# EAGLE board BQ25504 (EAGLE 9.6.1)
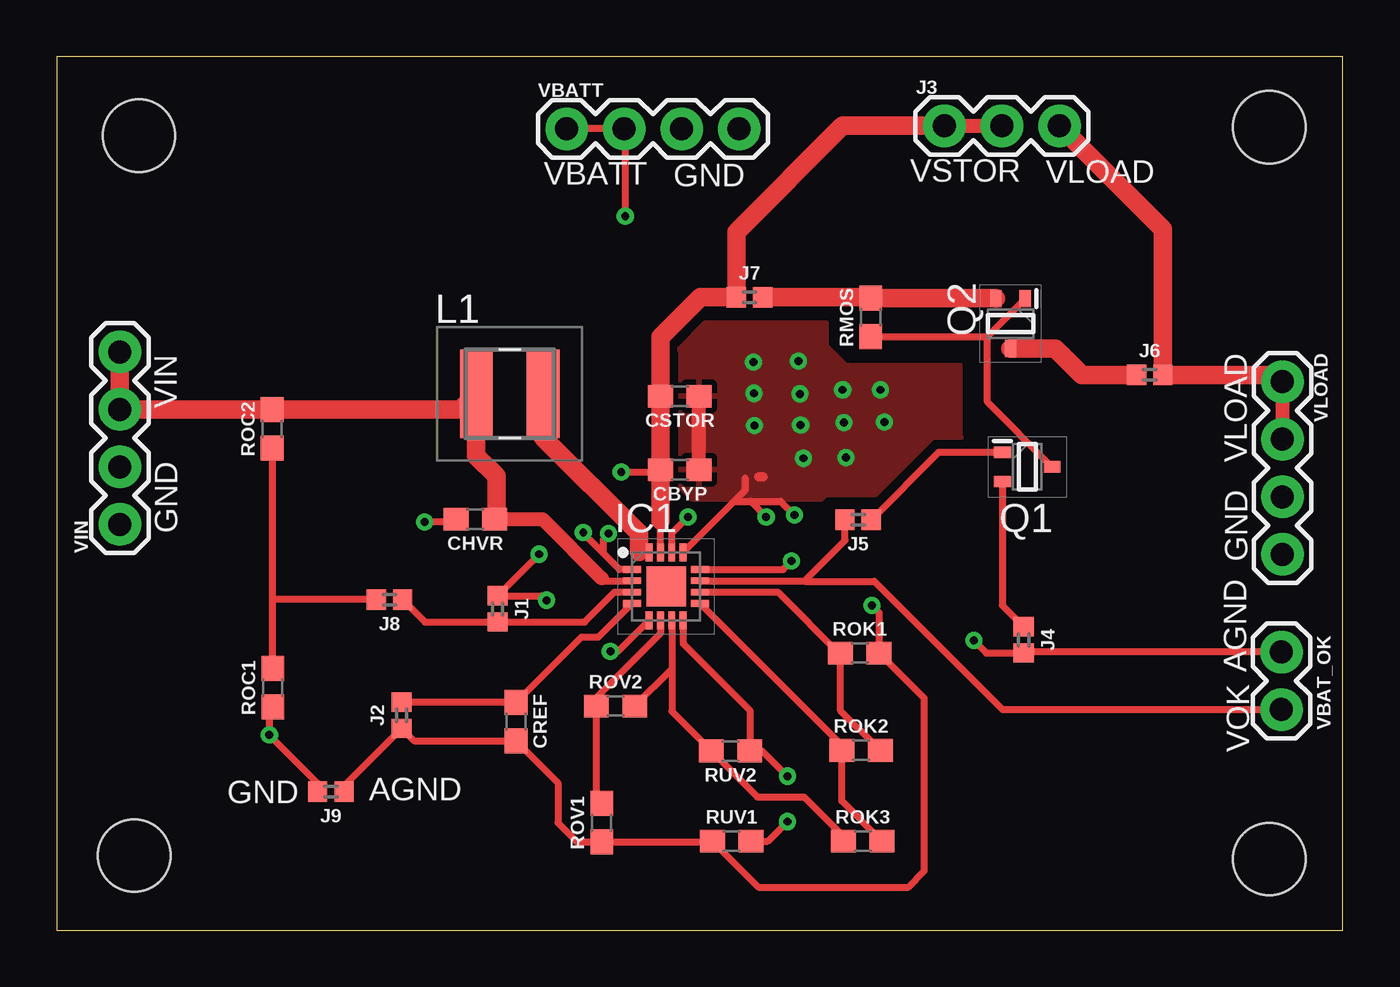
[diagram p0: board, top side]
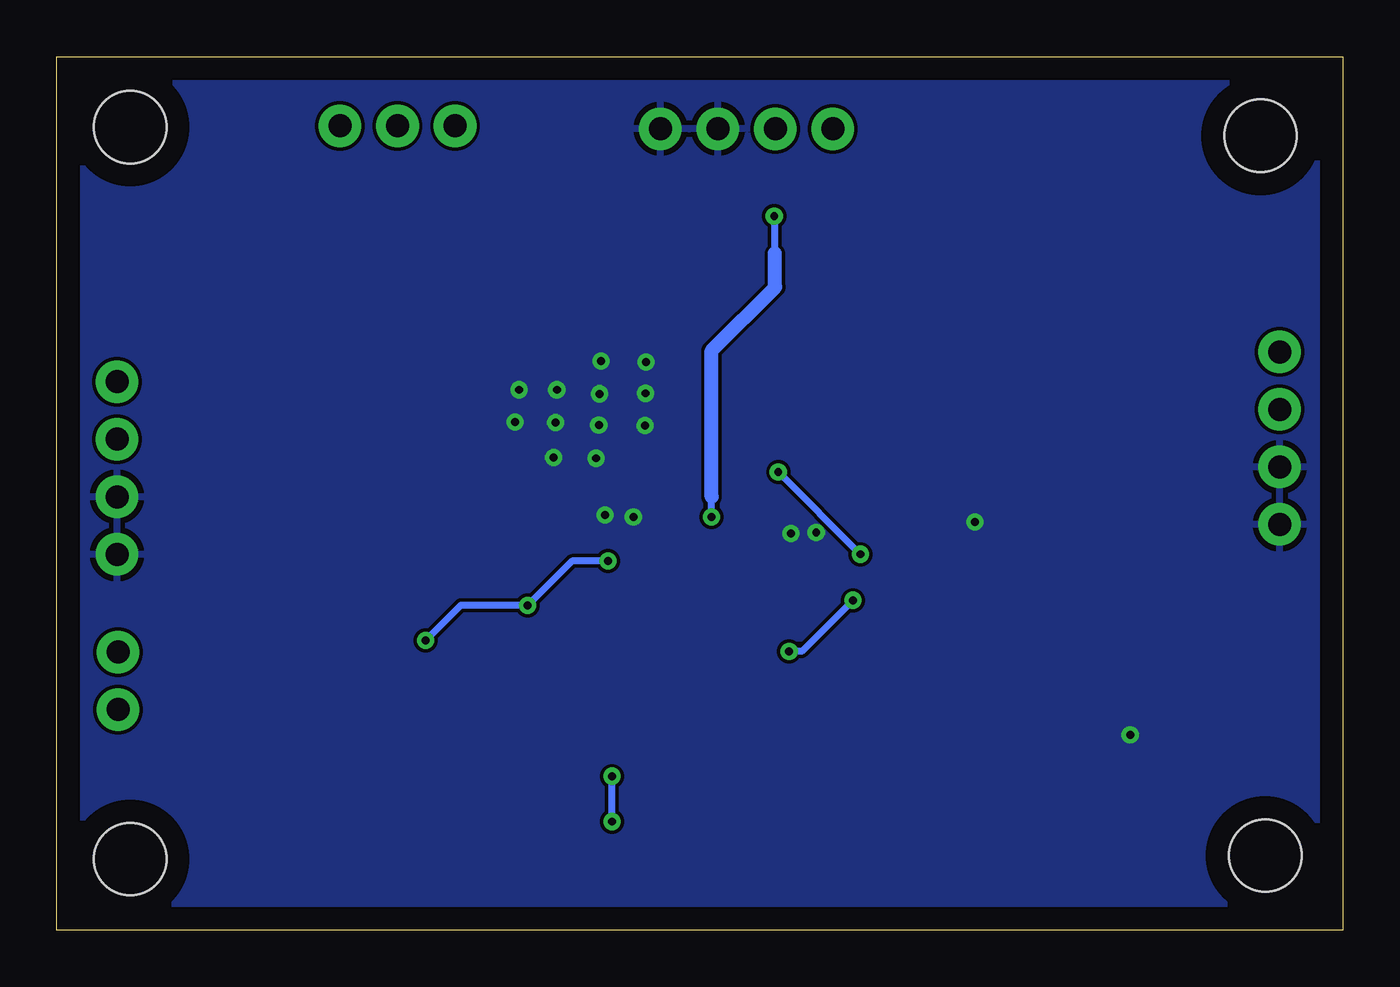
[diagram p1: board, bottom side, seen from below]

Size 56.82 x 38.6 mm. Coordinates in mm from the lower left corner, seen from the top.
Outline: 0,0 56.82,0 56.82,38.6 0,38.6 0,0
Copper layers (1*16): Top 0.035mm / dielectric 1.5mm / Bottom 0.035mm
Design rules "default": minimum track width 6mil, minimum drill 0.35mm, track to track 6mil, track to pad 6mil, pad to pad 6mil, via to via 6mil, smd to smd 6mil, copper to edge 40mil, drill to drill 6mil, minimum pad ring 10mil, minimum via ring 8mil, stop-mask expansion 4mil, vias tented up to drill 0mil, thermal gap 10mil
Holes 3.2 mm at 3.63,35.1 3.43,3.3 53.57,3.15 53.57,35.48

## Footprints (pad centres in the part's own frame; a part is rotated, then mirrored left to right if it is on the bottom)
0603 = smd 1.1 x 1: 1 -0.85,0; 2 0.85,0
QFN50P300X300X100-17N = smd 0.8 x 0.3: 1 -1.5,0.75; 2 -1.5,0.25; 3 -1.5,-0.25; 4 -1.5,-0.75; 9 1.5,-0.75; 10 1.5,-0.25; 11 1.5,0.25; 12 1.5,0.75 | smd 0.3 x 0.8: 5 -0.75,-1.5; 6 -0.25,-1.5; 7 0.25,-1.5; 8 0.75,-1.5; 13 0.75,1.5; 14 0.25,1.5; 15 -0.25,1.5; 16 -0.75,1.5 | smd 1.75 x 1.75: 17 0,0
0402 = smd 0.85 x 0.9: 1 -0.58,0; 2 0.58,0
1X03 = drill 1.016 pad 1.88: 1 0,0; 2 2.54,0; 3 5.08,0
LPS4018223MRC = smd 1.45 x 3.89: 1 -1.475,0; 2 1.475,0
SOT65P210X100-3N = smd 0.75 x 0.5: 1 -1.1,0.65; 2 -1.1,-0.65; 3 1.1,0
1X02 = drill 1.016 pad 1.88: 1 0,0; 2 2.54,0
1X04 = drill 1.016 pad 1.88: 1 0,0; 2 2.54,0; 3 5.08,0; 4 7.62,0

## Placement (x,y rotation side)
CBYP  0.01uF  [0603]  27.53,20.35 180 top
CHVR  4.7uF  [0603]  18.49,18.16 180 top
CREF  0.01uF  [0603]  20.29,9.22 270 top
CSTOR  4.7uF  [0603]  27.53,23.6 180 top
IC1  BQ25504RGTR  [QFN50P300X300X100-17N]  26.92,15.19 0 top
J1  0  [0402]  19.48,14.2 270 top
J2  0  [0402]  15.24,9.5 90 top
J3  [1X03]  39.22,35.53 0 top
J4  0  [0402]  42.72,12.83 270 top
J5  0  [0402]  35.41,18.14 180 top
J6  0  [0402]  48.29,24.54 0 top
J7  0  [0402]  30.61,27.97 0 top
J8  0  [0402]  14.71,14.61 180 top
J9  0  [0402]  12.12,6.12 180 top
L1  LPS4018-223MRC  [LPS4018223MRC]  20.02,23.7 0 top
Q1  BSS138WH6433XTMA1  [SOT65P210X100-3N]  42.88,20.47 0 top
Q2  BSS223PWH6327XTSA1  [SOT65P210X100-3N]  42.14,26.8 270 top
RMOS  1M  [0603]  35.97,27.08 90 top
ROC1  10M  [0603]  9.55,10.72 90 top
ROC2  10M  [0603]  9.53,22.15 90 top
ROK1  2.67M  [0603]  35.48,12.24 0 top
ROK2  2.32M  [0603]  35.53,7.95 0 top
ROK3  5.1M  [0603]  35.61,3.94 0 top
ROV1  3.6M  [0603]  24.08,4.75 90 top
ROV2  6.2M  [0603]  24.69,9.91 0 top
RUV1  5.6M  [0603]  29.82,3.94 0 top
RUV2  4.32M  [0603]  29.77,7.92 180 top
VBAT_OK  [1X02]  54.1,9.75 90 top
VBATT  [1X04]  22.53,35.41 0 top
VIN  [1X04]  2.79,17.93 90 top
VLOAD  [1X04]  54.15,24.23 270 top

## Library data of the parts
CBYP CHVR CREF CSTOR = SparkFun-Capacitors
IC1 = BQ25504RGTR; ARROW_PART_NUMBER: BQ25504RGTR; ARROW_PRICE-STOCK: https://www.arrow.com/en/products/bq25504rgtr/texas-instruments; DESCRIPTION: Ultra Low Power Boost Converter with Battery Management for Energy Harvester | Nano-Power Management; HEIGHT: 1mm; MANUFACTURER_NAME: Texas Instruments; MANUFACTURER_PART_NUMBER: BQ25504RGTR; MOUSER_PART_NUMBER: 595-BQ25504RGTR; MOUSER_PRICE-STOCK: https://www.mouser.co.uk/ProductDetail/Texas-Instruments/BQ25504RGTR?qs=LDM2r2BBpna1ocxRvQkZ2w%3D%3D
J1 J2 J4-J9 RMOS ROC1 ROC2 ROK1-ROK3 ROV1 ROV2 RUV1 RUV2 = SparkFun-Resistors
J3 = SparkFun-Connectors; PROD_ID: XXX-00000
L1 = LPS4018-223MRC; DESCRIPTION: Fixed Inductors LPS4018 Low Profile 22uH 0.9A 20% SMD; HEIGHT: 1.8mm; MANUFACTURER_NAME: COILCRAFT; MANUFACTURER_PART_NUMBER: LPS4018-223MRC; MOUSER_PART_NUMBER: 994-LPS4018-223MRC; MOUSER_PRICE-STOCK: https://www.mouser.co.uk/ProductDetail/Coilcraft/LPS4018-223MRC?qs=QQJxVsr8EGZ1iTyTHMP0jg%3D%3D
Q1 = BSS138WH6433XTMA1; ARROW_PART_NUMBER: BSS138WH6433XTMA1; ARROW_PRICE-STOCK: https://www.arrow.com/en/products/bss138wh6433xtma1/infineon-technologies-ag; DESCRIPTION: Infineon BSS138WH6433XTMA1 N-channel MOSFET Transistor, 0.28 A, 60 V, 3-Pin SOT-323; HEIGHT: 1mm; MANUFACTURER_NAME: Infineon; MANUFACTURER_PART_NUMBER: BSS138WH6433XTMA1; MOUSER_PART_NUMBER: 726-BSS138WH6433XTMA; MOUSER_PRICE-STOCK: https://www.mouser.co.uk/ProductDetail/Infineon-Technologies/BSS138WH6433XTMA1?qs=Dj8dEyEphkNlA40XmWLzSg%3D%3D
Q2 = BSS223PWH6327XTSA1; ARROW_PART_NUMBER: BSS223PWH6327XTSA1; ARROW_PRICE-STOCK: https://www.arrow.com/en/products/bss223pwh6327xtsa1/infineon-technologies-ag; DESCRIPTION: Infineon BSS223PWH6327XTSA1 P-channel MOSFET Transistor, 0.31 A, -20 V, 3-Pin SOT-323; HEIGHT: 1mm; MANUFACTURER_NAME: Infineon; MANUFACTURER_PART_NUMBER: BSS223PWH6327XTSA1; MOUSER_PART_NUMBER: 726-BSS223PWH6327XTS; MOUSER_PRICE-STOCK: https://www.mouser.co.uk/ProductDetail/Infineon-Technologies/BSS223PWH6327XTSA1?qs=Dj8dEyEphkMhtpM4HseAjA%3D%3D
VBAT_OK = SparkFun-Connectors
VBATT VIN VLOAD = SparkFun-Connectors; PROD_ID: CONN-09696

## Nets
AGND: CREF.2 IC1.12 J2.1 J4.2 J9.1 ROK1.2 ROV1.1 RUV1.1 VBAT_OK.2
GND: CBYP.1 CHVR.2 CSTOR.1 IC1.1 IC1.13 J9.2 ROC1.1 VBATT.3 VBATT.4 VIN.1 VIN.2 VLOAD.3 VLOAD.4
N$1: CREF.1 IC1.4 J2.2
N$2: CHVR.1 IC1.2 L1.1 ROC2.2 VIN.3 VIN.4
N$3: J8.2 ROC1.2 ROC2.1
N$4: IC1.7 ROK3.1 ROV2.2 RUV2.2
N$5: IC1.6 ROV1.2 ROV2.1
N$6: IC1.8 RUV1.2 RUV2.1
N$7: J4.1 Q1.2
N$8: IC1.11 J5.2 VBAT_OK.1
N$9: IC1.9 ROK2.1 ROK3.2
N$10: IC1.10 ROK1.1 ROK2.2
N$11: IC1.16 L1.2
N$12: J3.3 J6.2 VLOAD.1 VLOAD.2
N$13: Q1.3 Q2.1 RMOS.1
N$14: J5.1 Q1.1
N$15: IC1.14 VBATT.1 VBATT.2
N$16: J7.2 Q2.2 RMOS.2
N$17: J6.1 Q2.3
N$18: IC1.3 J1.2 J8.1
VSTOR: CBYP.2 CSTOR.2 IC1.5 IC1.15 J1.1 J3.1 J3.2 J7.1

## Tracks (layer width: path | path; a pad name or v marks a point on that pad's centre or on a via)
AGND  (via drill 0.35)
  Top 0.305: IC1.12 32.09,15.94 v32.46,16.31 | v36.02,14.35 36.33,14.03 ROK1.2 38.33,10.25 38.33,2.62 37.62,1.91 31,1.91 RUV1.1 28.93,3.9 ROV1.1 23,3.9 22.15,4.75 22.15,6.52 CREF.2 15.79,8.37 J2.1 12.7,6.38 J9.1 | v40.51,12.8 41.07,12.25 J4.2 42.77,12.29 VBAT_OK.2
  Bottom 0.305: v32.46,16.31 34.06,16.31 v36.02,14.35 38.96,14.35 v40.51,12.8
GND  (via drill 0.35)
  Top 0.305: ROC1.1 9.4,9.72 v9.4,8.64 11.54,6.5 J9.2 | CHVR.2 17.51,18.03 v16.26,18.03 | IC1.1 24.86,15.94 24.16,16.64 | v23.27,17.58 23.27,17.54 24.16,16.64 | 24.16,16.64 24.16,17.3 v24.38,17.53 | IC1.13 29.93,18.94 | 29.93,18.94 30.43,19.44 30.43,19.96 | 29.93,18.94 30.66,18.94 | 30.66,18.94 v31.34,18.26 | 30.66,18.94 31.98,18.94 v32.59,18.34
  Top 0.406: 31.02,20.04 31.22,20.04
  Top 0.61: CBYP.1 CSTOR.1
  other vias: 30.84,22.3 30.81,23.72 30.78,25.1 32.77,25.15 32.84,23.7 32.87,22.33 32.99,20.85 34.87,20.88 34.77,22.43 34.72,23.88 36.4,23.88 36.58,22.45
  pour Bottom: 0.51,38.1 0.51,0.51 56.13,0.51 56.13,38.1
  pour Top: 27.51,25.7 28.65,26.85 34.01,26.85 34.01,25.83 34.87,24.97 39.93,24.97 39.93,21.82 39.98,21.77 38.71,21.77 36.17,19.23 33.99,19.23 33.78,19.02 28.09,19.02 27.56,19.56 27.56,25.63 27.48,25.63 27.48,25.7
N$1
  Top 0.305: IC1.4 23.94,12.95 23.18,12.95 CREF.1 J2.2
N$2
  Top 0.305: 24.08,15.54 24.18,15.44 IC1.2
  Top 0.61: 24.08,15.54 21.46,18.16 CHVR.1
  Top 0.813: VIN.4 VIN.3 2.81,23 ROC2.2 17.84,23 L1.1 18.54,20.96 19.43,20.07 19.43,18.25 CHVR.1
N$3
  Top 0.305: ROC2.1 9.53,14.61 | 9.53,14.61 9.53,11.59 ROC1.2 | J8.2 9.53,14.61
N$4
  Top 0.305: ROV2.2 27.17,11.54 | IC1.7 27.17,11.54 | 27.17,11.54 27.17,9.67 RUV2.2 30.95,5.89 33.02,5.89 34.76,4.15 ROK3.1
N$5
  Top 0.305: IC1.6 26.67,13.11 23.84,10.28 ROV2.1 23.84,5.84 ROV1.2
N$6  (via drill 0.35)
  Top 0.305: IC1.8 27.67,12.66 30.62,9.72 RUV2.1 31.17,7.92 v32.28,6.81 | RUV1.2 31.42,3.94 v32.28,4.8
  Bottom 0.305: v32.28,4.8 v32.28,6.81
N$7
  Top 0.305: Q1.2 41.77,14.36 J4.1
N$8
  Top 0.305: IC1.11 33.04,15.44 | J5.2 34.83,17.23 33.04,15.44 | 33.04,15.44 33.06,15.42 36.12,15.42 41.78,9.75 VBAT_OK.1
N$9
  Top 0.305: ROK3.2 34.69,5.71 ROK2.1 34.69,8.18 IC1.9
N$10
  Top 0.305: ROK2.2 34.63,9.7 34.63,12.17 | 34.63,12.17 ROK1.1 | IC1.10 31.86,14.94 34.63,12.17
N$11
  Top 0.254: 25.72,16.71 25.74,16.69 IC1.16
  Top 0.813: L1.2 21.49,21.77 25.72,17.54 25.72,16.71
N$12
  Top 0.61: VLOAD.1 VLOAD.2
  Top 0.813: VLOAD.1 53.85,24.54 J6.2 48.87,30.97 J3.3
N$13
  Top 0.305: RMOS.1 41.12,26.23 | 41.12,26.23 Q2.1 | Q1.3 41.12,23.33 41.12,26.23
N$14
  Top 0.305: J5.1 38.97,21.12 Q1.1
N$15  (via drill 0.35)
  Top 0.305: IC1.14 27.17,17.55 v27.89,18.26 | v25.12,31.55 25.12,35.36 VBATT.2 VBATT.1
  Bottom 0.305: v27.89,18.26 27.89,19.15 | 25.09,29.9 25.09,31.52 v25.12,31.55
  Bottom 0.61: 27.89,19.15 27.89,25.6 25.07,28.42 25.09,28.45 25.09,29.9
N$16
  Top 0.813: J7.2 35.93,27.96 RMOS.2 41.46,27.93 Q2.2
N$17
  Top 0.813: Q2.3 44.13,25.7 45.29,24.54 J6.1
N$18
  Top 0.305: J8.1 16.27,13.62 J1.2 23.32,13.62 24.64,14.94 IC1.3
VSTOR  (via drill 0.35)
  Top 0.305: v21.64,14.58 21.44,14.78 J1.1 v21.31,16.61 | v24.46,12.32 24.8,12.32 IC1.5 | v24.94,20.24 26.58,20.24 CBYP.2 | IC1.15 26.67,18.11
  Top 0.61: J3.1 J3.2
  Top 0.813: 26.67,18.11 26.67,20.33 CBYP.2 CSTOR.2 26.68,26.2 28.45,27.96 J7.1 30.03,30.84 34.72,35.53 J3.1
  Bottom 0.305: v21.64,14.58 23.9,12.32 v24.46,12.32 | v21.31,16.61 v24.94,20.24

## Text on the board
tPlace: GND | VBATT | VSTOR | VLOAD | VIN | VLOAD | GND | GND | AGND | VOK | GND | AGND